# EAGLE board tiny13_charlie4_50mm_boosted_optical (EAGLE 6.2)
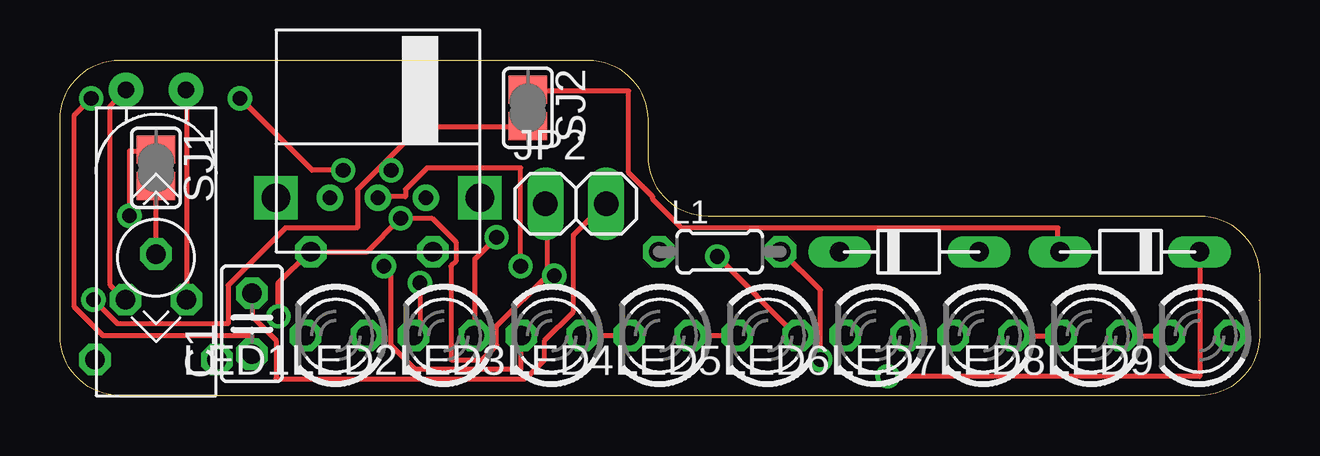
[diagram p0: board, top side]
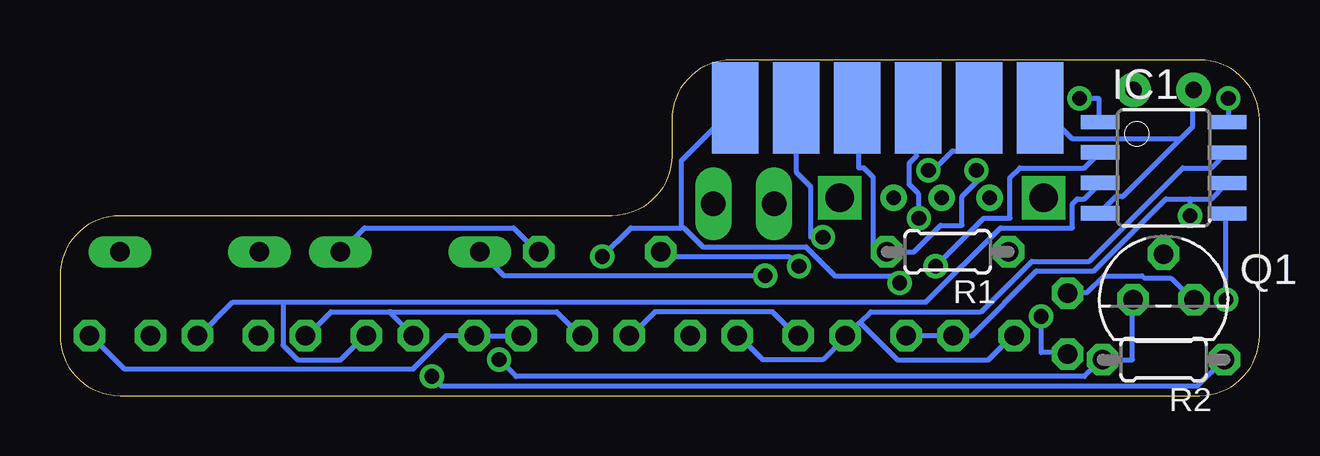
[diagram p1: board, bottom side, seen from below]

Size 50 x 14 mm. Coordinates in mm from the lower left corner, seen from the top.
Outline: 49.96,4 50,4
Outline: 50,4 50,5 arc90 47.5,7.5 27,7.5 arc-90 24.5,10 24.5,11.5 arc90 22,14 2.5,14 arc90 0,11.5 0,2.5 arc90 2.5,0 47.5,0 arc90 50,2.5 50,4
Copper layers (1*16): Top 0.035mm / dielectric 1.5mm / Bottom 0.035mm
Design rules: minimum track width 8mil, minimum drill 24mil, track to track 6mil, track to pad 6mil, pad to pad 6mil, via to via 6mil, smd to smd 0mil, copper to edge 10mil, drill to drill 8mil, minimum pad ring 10mil, minimum via ring 8mil, stop-mask expansion 4mil, vias tented up to drill 0mil, thermal gap 10mil

## Footprints (pad centres in the part's own frame; a part is rotated, then mirrored left to right if it is on the bottom)
C025-025X050 = drill 0.813 octagon: 1 -1.27,0; 2 1.27,0
8S1 = smd 0.6 x 1.6: 1 -1.905,-2.654; 2 -0.645,-2.654; 3 0.625,-2.654; 4 1.895,-2.654; 5 1.905,2.654; 6 0.635,2.654; 7 -0.635,2.654; 8 -1.905,2.654
1X02 = drill 1.016 long: 1 -1.27,0; 2 1.27,0
0204/5 = drill 0.813 octagon: 1 -2.54,0; 2 2.54,0
LED3MM = drill 0.813 octagon: A -1.27,0; K 1.27,0
TO92 = drill 0.813 octagon: 1 1.27,0; 2 0,1.905; 3 -1.27,0
SJ = smd 1.168 x 1.6: 1 -0.762,0; 2 0.762,0
TILT_SWITCH_MECHANICAL = drill 0.7 pad 1.422: P$1 -0.75,1.25; P$2 -0.75,3.75
CONTACT_ISP_PROGRAMMER_1X6_ATMEL = smd 1.93 x 3.81: GND 6.35,0; MISO -6.35,0; MOSI 3.81,0; RST -1.27,0; SCK -3.81,0; VCC 1.27,0
D-7.5 = drill 0.813 long: A 2.81,0; C -3,0
SWITCH = drill 0.6: 1 2.25,6.25; 2 2.25,4.25; 3 2.25,2.25 | drill 1.2 square: C1 2.25,8.5; C2 2.25,0

## Placement (x,y rotation side)
C1  [C025-025X050]  8,3 90 top
IC1  TINY13-20SSU  [8S1]  4,9.5 270 bottom
JP2  [1X02]  21.5,8 0 top
L1  [0204/5]  27.5,6 0 top
LED1  [LED3MM]  11.5,2.5 180 top
LED2  [LED3MM]  16,2.5 180 top
LED3  [LED3MM]  20.5,2.5 180 top
LED4  [LED3MM]  25,2.5 180 top
LED5  [LED3MM]  29.5,2.5 180 top
LED6  [LED3MM]  34,2.5 180 top
LED7  [LED3MM]  38.5,2.5 180 top
LED8  [LED3MM]  43,2.5 180 top
LED9  [LED3MM]  47.5,2.5 180 top
Q1  BSS101  [TO92]  4,4 0 bottom
R1  [0204/5]  13,6 180 bottom
R2  [0204/5]  4,1.5 180 bottom
SJ1  [SJ]  4,9.5 270 top
SJ2  [SJ]  19.5,12 270 top
U$1  TILT_SWITCH_MECHANICAL  [TILT_SWITCH_MECHANICAL]  1.5,12 270 top
U$2  AVR_ISP_6_PIN_1X6_SMT_CONTACT_PROGRAMMER  [CONTACT_ISP_PROGRAMMER_1X6_ATMEL]  15.5,12 0 bottom
U$3  D-6  [D-7.5]  35.5,6 0 top
U$4  D-6  [D-7.5]  44.5,6 180 top
U$5  SWITCH  [SWITCH]  17.5,6 90 top

## Library data of the parts
C1 R1 R2 = resistor
IC1 = atmel; MPN: ATTINY13-20SSU; OC_FARNELL: 1455133; OC_NEWARK: 58M3771
JP2 = pinhead
L1 = rcl
LED1-LED9 = 0-svo
Q1 = transistor-fet
SJ1 SJ2 = jumper
U$1-U$5 = Mrule

## Nets
GND: C1.2 IC1.4 JP2.2 Q1.1 U$1.P$1 U$2.GND
N$1: IC1.2 LED3.K LED4.A LED5.K LED6.A LED7.A LED8.K
N$2: IC1.7 LED1.K LED2.A LED3.A LED4.K U$2.SCK
N$3: L1.2 Q1.3 R2.2 U$1.P$2 U$3.A
N$4: IC1.3 LED7.K LED8.A LED9.K
N$5: R2.1 U$4.C
N$6: IC1.1 R1.2 U$2.RST
N$7: IC1.5 SJ2.2 U$2.MOSI
N$8: IC1.6 LED1.A LED2.K LED5.A LED6.K LED9.A SJ1.1 U$2.MISO
N$9: Q1.2 SJ1.2
N$10: SJ2.1 U$4.A
N$11: L1.1 U$5.2
VCC: C1.1 IC1.8 JP2.1 R1.1 U$2.VCC U$3.C

## Tracks (layer width: path | path; a pad name or v marks a point on that pad's centre or on a via)
GND
  Top 0.203: C1.2 8,3.3 9,2.3 9,0.7 19.4,0.7 20.2,1.5 20.2,2.3 21.4,3.5 21.4,6.7 22.7,8 JP2.2 | U$1.P$1 2.1,12.1 2.1,4.6 2.7,4 Q1.1
  Bottom 0.203: 3.35,10.65 2.8,11.2 2.8,12.7 U$1.P$1 | 3.35,10.65 5.7,8.3 6,8.3 6.6,7.7 IC1.4 | U$2.GND 9.1,12 7.8,10.7 3.4,10.7 3.35,10.65 | Q1.1 2.8,4 3.7,4.9 4.8,4.9 4.9,5 6.5,5 7.2,4.3 8,4.3 C1.2
N$1  (via drill 0.61)
  Top 0.203: LED5.K LED4.A | LED7.A LED8.K | v13.5,5.4 13.8,5.1 13.8,2.1 14.8,1.1 19.2,1.1 19.2,2.5 LED3.K
  Bottom 0.203: 36.25,3.45 36.3,3.5 38.7,3.5 39.7,2.5 LED7.A | 36.25,3.45 35.3,2.5 LED6.A | LED5.K 28.3,2.5 29.3,3.5 36.2,3.5 36.25,3.45 | v13.5,5.4 11.5,7.4 10.4,7.4 10.4,9.1 10,9.5 7.3,9.5 6.7,10.1 IC1.2 | LED4.A 26.2,2.5 25.2,3.5 20.3,3.5 19.3,2.5 LED3.K
N$2  (via drill 0.61)
  Top 0.203: LED4.K LED3.A | v18.2,6.6 17.3,5.7 17.3,2.5 LED2.A
  Bottom 0.203: 16.65,3.05 17.2,2.5 LED2.A 17.3,2.4 18.2,1.5 20.7,1.5 21.7,2.5 LED3.A | 16.65,3.05 16.2,3.5 11.6,3.5 9.5,5.6 7.1,5.6 3.2,9.5 2,9.5 1.4,10.1 IC1.7 | 16.65,3.05 15.1,1.5 11.3,1.5 10.3,2.5 LED1.K | v18.2,6.6 18.7,6.6 18.7,8.7 19.3,9.3 U$2.SCK
N$3  (via drill 0.61)
  Top 0.203: U$1.P$2 5.3,12.7 5.3,4 Q1.3 | v31.7,1.5 31.7,4.4 30.1,6 L1.2
  Bottom 0.203: L1.2 30.1,6 31.1,7 37.3,7 U$3.A | Q1.3 5.3,4 5.3,1.5 R2.2 6.6,1.5 7.3,0.8 31,0.8 v31.7,1.5
N$4
  Top 0.203: LED8.A LED9.K
  Bottom 0.203: 40.7,3.9 42.8,3.9 44.2,2.5 LED8.A | 40.7,3.9 13.9,3.9 10.8,7 7.8,7 7.8,8 7.6,8.2 7.3,8.2 6.7,8.8 IC1.3 | 40.7,3.9 40.7,2.1 40.1,1.5 38.3,1.5 37.3,2.5 LED7.K
N$5  (via drill 0.61)
  Top 0.203: v34.5,0.8 47.5,0.8 U$4.C
  Bottom 0.203: v34.5,0.8 34.1,0.4 2.6,0.4 1.5,1.5 R2.1
N$6  (via drill 0.61)
  Top 0.203: v7.5,12.4 10.5,9.4 v11.8,9.4
  Bottom 0.203: v7.5,12.4 6.7,12.4 6.7,11.5 IC1.1 | v11.8,9.4 11.8,8.9 12.4,8.3 12.4,7.1 13.3,7.1 14.4,6 R1.2 15.5,6.1 16.1,6.1 16.1,9.1 16.5,9.5 16.7,9.5 16.7,12 U$2.RST
N$7  (via drill 0.61)
  Top 0.203: v1.4,4 2.4,3 7,3 7,4.6 9.4,7 12.4,7 12.4,8.6 13.55,9.75 | 13.55,9.75 15,11.2 19.5,11.2 SJ2.2 | v13.8,9.4 13.6,9.6 13.6,9.7 13.55,9.75
  Bottom 0.203: v1.4,4 1.4,7.5 IC1.5 | v13.8,9.4 13.6,9.4 12.8,10.2 11.7,10.2 U$2.MOSI
N$8  (via drill 0.61)
  Top 0.203: v2.9,7.5 2.9,10.2 4,10.2 SJ1.1 | v27.4,5.8 30.7,2.5 LED5.A | v15,4.7 15,2.7 14.8,2.5 LED2.K
  Bottom 0.203: 2.9,8.2 3.9,8.2 6.9,5.2 9.3,5.2 12,2.5 LED1.A LED2.K | 2.9,8.2 2,8.2 1.4,8.8 IC1.6 | 2.9,8.2 v2.9,7.5 | LED5.A LED6.K 33.9,2.5 35.3,1.1 47.3,1.1 48.7,2.5 LED9.A | 24.1,7 24.1,9.8 21.9,12 U$2.MISO | 24.1,7 26.2,7 v27.4,5.8 | v15,4.7 15.3,5 17.7,5 18.9,6.2 23.2,6.2 24,7 24.1,7
N$9
  Top 0.203: Q1.2 SJ1.2
N$10
  Top 0.203: SJ2.1 19.5,12.7 23.7,12.7 23.7,9.3 24.7,8.3 24.7,8.2 25.9,7 41.6,7 41.6,6 U$4.A
N$11  (via drill 0.61)
  Top 0.203: v19.2,5.4 19.2,9.5 15.3,9.5 14.4,8.6 14.4,8.3 13.3,8.3 U$5.2
  Bottom 0.203: v19.2,5.4 19.6,5.8 24.7,5.8 24.9,6 L1.1
VCC  (via drill 0.61)
  Top 0.203: JP2.1 20.3,8 20.3,5.3 v20.6,5 20.4,5.1 18.2,2.9 18.2,2.1 17.6,1.5 16.3,1.5 16.3,5.4 16.5,5.6 16.5,6.4 15.5,7.4 v14.2,7.4 12.8,6 R1.1 10.4,6 9.1,4.7 v9.1,3.3 | v1.3,12.4 0.6,11.7 0.6,3.7 1.8,2.5 8,2.5 C1.1
  Bottom 0.203: U$3.C 31.5,5 v20.6,5 | v1.3,12.4 1.3,11.5 IC1.8 | v9.1,3.3 9.1,1.8 8,1.8 C1.1 | v14.2,7.4 14.2,8.4 14.6,8.8 14.6,9.7 14.3,10 14.3,12 U$2.VCC